# EAGLE board SterownikCNC4 (EAGLE 7.5.0)
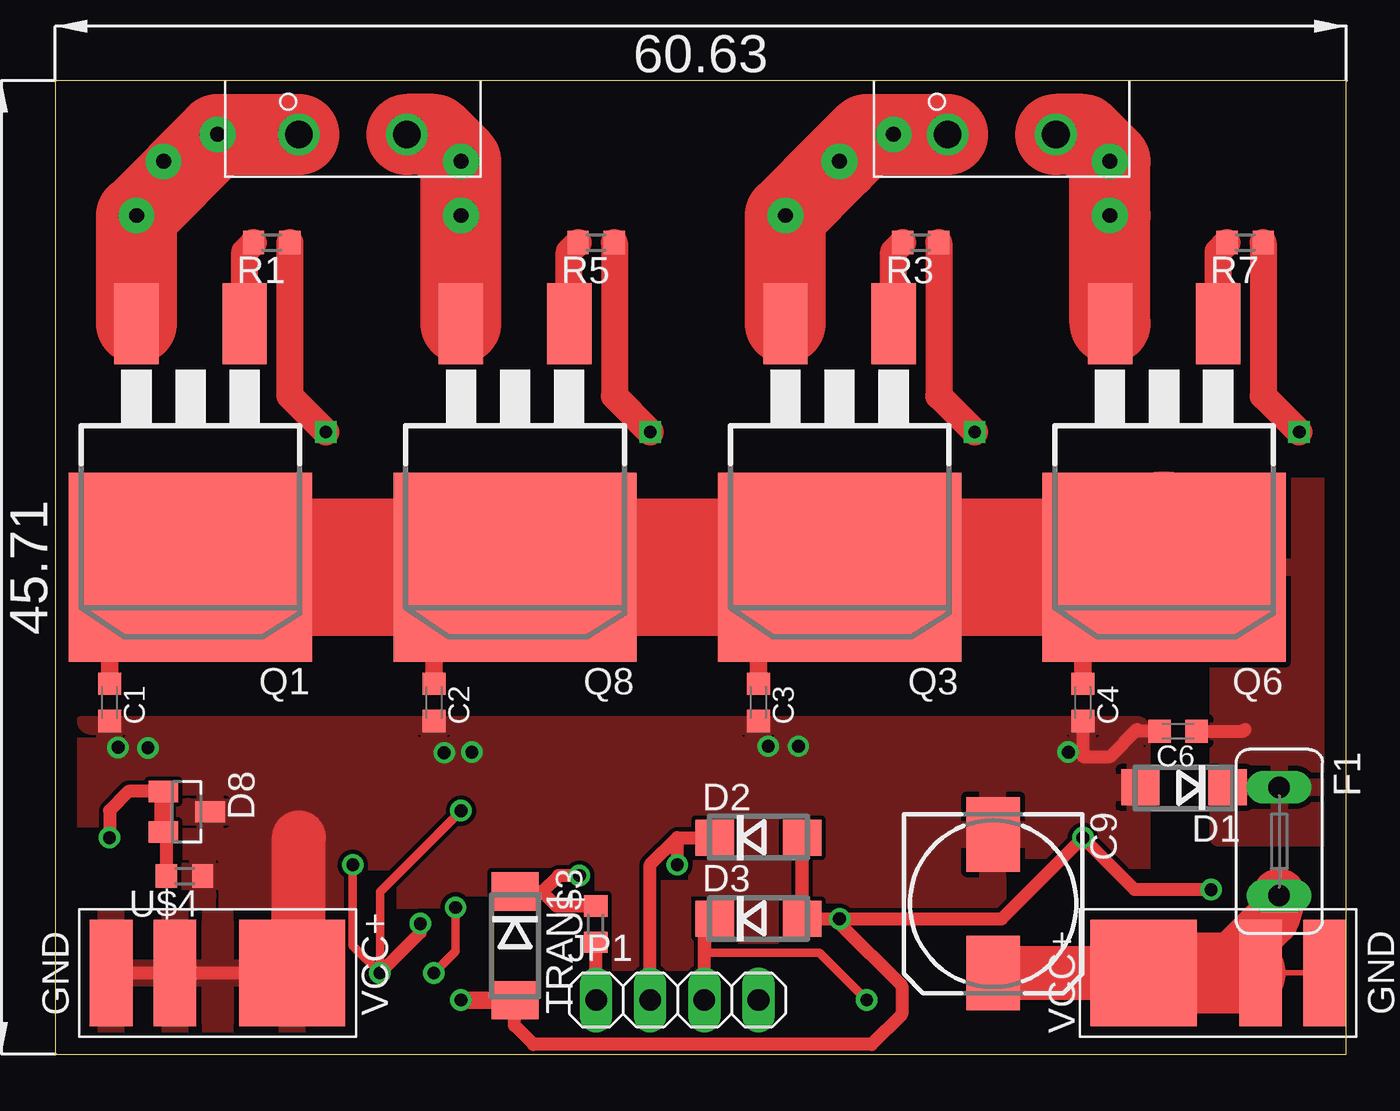
[diagram p0: board, top side]
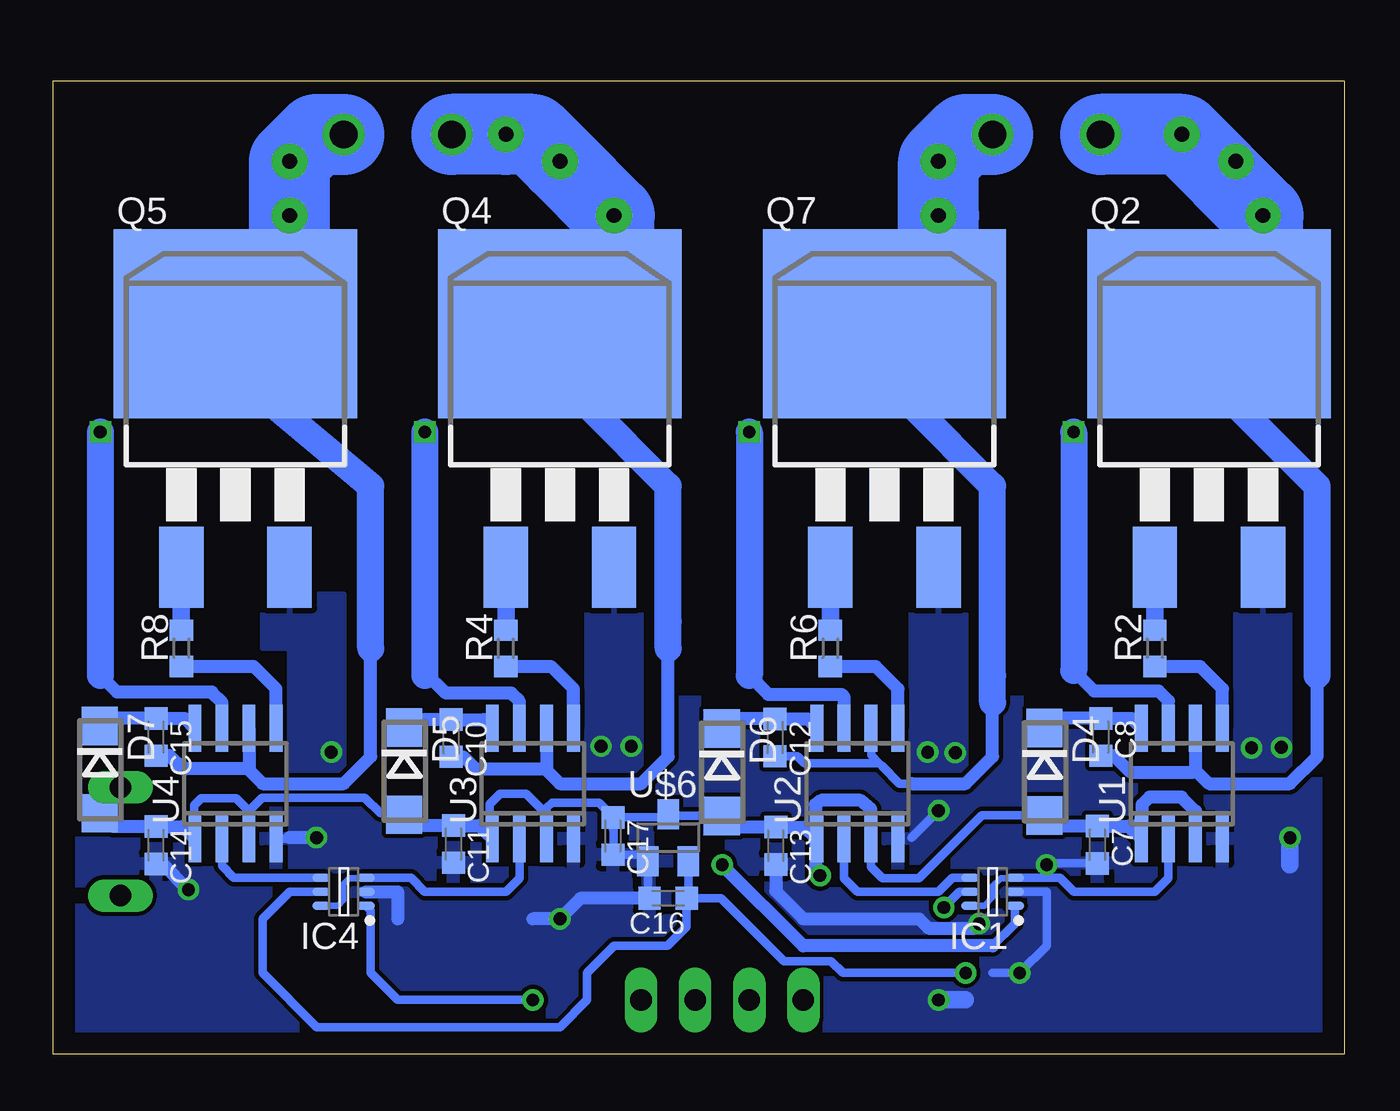
[diagram p1: board, bottom side, seen from below]

Size 60.63 x 45.71 mm. Coordinates in mm from the lower left corner, seen from the top.
Outline: 0,0 60.63,0 60.63,45.71 0,45.71 0,0
Copper layers (1*16): Top 0.035mm / dielectric 1.5mm / Bottom 0.035mm
Design rules "default": minimum track width 10mil, minimum drill 24mil, track to track 8mil, track to pad 8mil, pad to pad 8mil, via to via 8mil, smd to smd 8mil, copper to edge 40mil, drill to drill 8mil, minimum pad ring 10mil, minimum via ring 8mil, stop-mask expansion 4mil, vias tented up to drill 0mil, thermal gap 10mil

## Footprints (pad centres in the part's own frame; a part is rotated, then mirrored left to right if it is on the bottom)
C0603K = smd 1.05 x 1.08: 1 -0.875,0; 2 0.875,0
153CLV-0810 = smd 3.5 x 2.5: + 3.25,0; - -3.25,0
DO214AC = smd 1.8 x 1.7: A 2.05,0; C -2.05,0
SOT23 = smd 1 x 1.4: 1 -0.95,-1.1; 2 0.95,-1.1; 3 0,1.1
TE5 = drill 1.016 long: 1 -2.54,0; 2 2.54,0
SOT65P210X110-6AN_SC88_SC70-6 = smd 0.85 x 0.4: 1 -1.05,0.65; 2 -1.05,0; 3 -1.05,-0.65; 4 1.05,-0.65; 5 1.05,0; 6 1.05,0.65
1X04 = drill 1.016 long: 1 -3.81,0; 2 -1.27,0; 3 1.27,0; 4 3.81,0
D2PACK = smd 2.083 x 3.81: 1 -2.54,-8.89; 3 2.54,-8.89 | smd 11.43 x 8.89: 2 0,2.54
R0603 = smd 1 x 1.1: 1 -0.85,0; 2 0.85,0
DO214AA = smd 1.8 x 2.2: A 2.55,0; C -2.55,0
SO08 = smd 0.6 x 2.2: 1 -1.905,-2.6; 2 -0.635,-2.6; 3 0.635,-2.6; 4 1.905,-2.6; 5 1.905,2.6; 6 0.635,2.6; 7 -0.635,2.6; 8 -1.905,2.6
T-DEANS = smd 5 x 5: P$1 0,-3.5 | smd 5 x 2: P$2 0,2; P$3 0,5
0603 = smd 1 x 1.1: 1 -0.85,0; 2 0.85,0
PTB-5.08MM-02 = drill 1.3: 1 -2.54,0; 2 2.54,0

## Placement (x,y rotation side)
C1  100nF/50v  [C0603K]  2.54,16.51 270 top
C2  100nF/50v  [C0603K]  17.78,16.51 270 top
C3  100nF/50v  [C0603K]  33.02,16.51 270 top
C4  100nF/50v  [C0603K]  48.26,16.51 270 top
C6  10uF/50v  [C0603K]  52.73,15.16 180 top
C7  100nF/50v  [C0603K]  11.58,9.83 270 bottom
C8  10uF/50v  [C0603K]  11.43,14.88 270 bottom
C9  100uF  [153CLV-0810]  44.04,7.06 270 top
C10  10uF/50v  [C0603K]  41.94,14.83 270 bottom
C11  100nF/50v  [C0603K]  41.83,9.86 270 bottom
C12  10uF/50v  [C0603K]  26.72,14.86 270 bottom
C13  100nF/50v  [C0603K]  26.7,9.78 270 bottom
C14  100nF/50v  [C0603K]  55.8,9.8 270 bottom
C15  10uF/50v  [C0603K]  55.8,14.88 270 bottom
C16  100nF  [C0603K]  31.75,7.32 180 bottom
C17  100nF  [C0603K]  34.34,10.24 270 bottom
D1  E7-DO214AC  [DO214AC]  53.01,12.52 180 top
D2  E7-DO214AC  [DO214AC]  33.02,10.16 0 top
D3  E7-DO214AC  [DO214AC]  33.02,6.35 0 top
D4  E7-DO214AC  [DO214AC]  14.07,13.26 270 bottom
D5  E7-DO214AC  [DO214AC]  44.15,13.28 270 bottom
D6  E7-DO214AC  [DO214AC]  29.24,13.23 270 bottom
D7  E7-DO214AC  [DO214AC]  58.45,13.36 270 bottom
D8  BAT54S  [SOT23]  6.17,11.38 270 top
F1  [TE5]  57.48,9.98 270 top
IC1  NC7WP14P6X  [SOT65P210X110-6AN_SC88_SC70-6]  16.51,7.62 180 bottom
IC4  NC7WP14P6X  [SOT65P210X110-6AN_SC88_SC70-6]  46.99,7.62 180 bottom
JP1  [1X04]  29.21,2.54 0 top
Q1  IRF3704S  [D2PACK]  6.35,25.4 180 top
Q2  IRF3704S  [D2PACK]  6.35,31.75 0 bottom
Q3  IRF3704S  [D2PACK]  36.83,25.4 180 top
Q4  IRF3704S  [D2PACK]  36.83,31.75 0 bottom
Q5  IRF3704S  [D2PACK]  52.07,31.75 0 bottom
Q6  IRF3704S  [D2PACK]  52.07,25.4 180 top
Q7  IRF3704S  [D2PACK]  21.59,31.75 0 bottom
Q8  IRF3704S  [D2PACK]  21.59,25.4 180 top
R1  10  [R0603]  10.16,38.1 180 top
R2  10  [R0603]  8.89,19.05 90 bottom
R3  10  [R0603]  40.64,38.1 180 top
R4  10  [R0603]  39.37,19.05 90 bottom
R5  10  [R0603]  25.4,38.1 180 top
R6  10  [R0603]  24.13,19.05 90 bottom
R7  10  [R0603]  55.88,38.1 180 top
R8  10  [R0603]  54.61,19.05 90 bottom
TRAN1  SMBJ12A-E3/52  [DO214AA]  21.59,5.08 270 top
U1  IR2104  [SO08]  7.62,12.7 0 bottom
U2  IR2104  [SO08]  22.86,12.7 0 bottom
U3  IR2104  [SO08]  38.1,12.7 0 bottom
U4  IR2104  [SO08]  52.07,12.7 0 bottom
U$2  T-DEANS  [T-DEANS]  54.61,3.81 270 top
U$3  FUSE0603  [0603]  25.37,6.1 90 top
U$4  FERYT_0603  [R0603]  6.07,8.36 180 top
U$5  T-DEANS  [T-DEANS]  7.62,3.81 90 top
U$6  TS9011SCX  [SOT23]  31.75,10.16 0 bottom
U$7  PTB-02_5.08MM  [PTB-5.08MM-02]  13.97,43.18 0 top
U$9  PTB-02_5.08MM  [PTB-5.08MM-02]  44.45,43.18 0 top

## Library data of the parts
C1-C4 C6-C17 R1-R8 U$4 = rcl
D1-D8 TRAN1 = diode
F1 = fuse; OC_FARNELL: unknown; OC_NEWARK: unknown
IC1 IC4 = bufory,invertery
JP1 = pinhead
Q1-Q8 = transistor-power
U1-U4 U$7 U$9 = robione
U$2 U$5 = Conector_T-deans
U$3 = fuse
U$6 = v-reg

## Nets
+3V3: C16.1 IC1.5 IC4.5 U$6.2
+24V: C1.1 C2.1 C3.1 C4.1 C6.1 D1.C F1.1 Q1.2 Q3.2 Q6.2 Q8.2
F2: JP1.1 U$3.1
GND: C7.2 C11.2 C13.2 C14.2 C16.2 C17.2 D2.A D3.A D8.1 D8.2 IC1.2 IC4.2 TRAN1.A U1.4 U2.4 U3.4 U4.4 U$4.2 U$6.1
GNDA: C1.2 C2.2 C3.2 C4.2 C6.2 C9.- D1.A D8.3 Q2.3 Q4.3 Q5.3 Q7.3 U$4.1 U$5.P$1 U$5.P$2 U$5.P$3
M_OUT: C8.2 Q1.3 Q2.2 U1.6 U$7.1
M_OUT1: C12.2 Q7.2 Q8.3 U2.6 U$7.2
M_OUT2: C10.2 Q3.3 Q4.2 U3.6 U$9.1
M_OUT3: C15.2 Q5.2 Q6.3 U4.6 U$9.2
N$1: Q1.1 R1.2
N$2: Q2.1 R2.2
N$3: R1.1 U1.7
N$4: R2.1 U1.5
N$5: IC1.4 U2.2
N$6: IC4.4 U4.2
N$7: R5.1 U2.7
N$8: R6.1 U2.5
N$10: Q7.1 R6.2
N$11: Q8.1 R5.2
N$12: C10.1 D5.C U3.8
N$13: C9.+ F1.2 U$2.P$1 U$2.P$2 U$2.P$3
N$14: R3.1 U3.7
N$15: R4.1 U3.5
N$16: Q4.1 R4.2
N$17: Q3.1 R3.2
N$18: C15.1 D7.C U4.8
N$20: R7.1 U4.7
N$21: R8.1 U4.5
N$22: Q5.1 R8.2
N$23: Q6.1 R7.2
N$49: C8.1 D4.C U1.8
N$51: C12.1 D6.C U2.8
PWM1: D2.C IC1.1 JP1.2
PWM1_NEG: IC1.3 IC1.6 U1.2
PWM2: D3.C IC4.1 JP1.3
PWM2_NEG: IC4.3 IC4.6 U3.2
PWM3: JP1.4
VCC: C7.1 C11.1 C13.1 C14.1 C17.1 D4.A D5.A D6.A D7.A TRAN1.C U1.1 U1.3 U2.1 U2.3 U3.1 U3.3 U4.1 U4.3 U$3.2 U$6.3

## Tracks (layer width: path | path; a pad name or v marks a point on that pad's centre or on a via)
+3V3  (via drill 0.6 pad 0.61)
  Top 0.406: v18.8,6.88 18.8,4.83 v17.78,3.81
  Bottom 0.406: IC1.5 18.06,7.62 v18.8,6.88 | IC4.5 49.53,7.62 50.8,6.35 50.8,3.81 48.26,1.27 36.83,1.27 35.56,2.54 35.56,3.81 34.29,5.08 31.77,5.08 30.88,5.98 C16.1 | U$6.2 30.8,7.39 C16.1 | v17.78,3.81 23.55,3.81 24.11,4.37 26.31,4.37 29.26,7.32 C16.1
+24V
  Top 0.61: C6.1 55.8,15.16 55.88,15.24
  Top 0.813: C1.1 2.54,21.59 3.81,22.86 Q1.2 | C2.1 17.78,22.86 | C3.1 33.02,20.32 35.56,22.86 | C4.1 48.26,20.32 50.8,22.86
  Top 6.452: Q1.2 17.78,22.86 Q8.2 35.56,22.86 Q3.2 50.8,22.86 Q6.2 52.07,24.13
  pour Top: 54.61,26.67 60.96,26.67 60.96,10.16 54.61,10.16
F2
  Top 0.61: JP1.1 25.4,5.22 U$3.1
GND  (via drill 0.6 pad 0.61)
  Top 0.406: v13.97,8.89 13.97,5.08 v15.24,3.81 15.24,7.62 v19.05,11.43
  Top 0.61: D3.A D2.A 35.07,6.84 35.56,6.35 v36.83,6.35 | D8.1 3.44,12.33 2.54,11.43 v2.54,10.16 | U$4.2 5.22,10.28 D8.2 | v54.28,7.72 50.7,7.72 v48.26,10.16 44.45,6.35 v36.83,6.35 | v17.14,6.12 17.14,5.71 v15.24,3.81 | v36.83,6.35 36.83,6.12 39.75,3.2 39.75,1.88 38.33,0.46 22.45,0.46 21.57,1.35 21.57,2.5 TRAN1.A
  Top 0.813: D8.2 D8.1 | TRAN1.A v19.06,2.53 v19.05,2.54
  Bottom 0.406: U4.4 48.32,10.1 v48.26,10.16 | C16.2 32.7,7.39 U$6.1 33,9.36 C17.2 | C7.2 13.9,8.96 v13.97,8.89 | 16.51,3.81 v15.24,3.81 13.97,5.08 13.97,7.62 IC1.2 | v19.05,11.43 20.32,10.16
  Bottom 0.61: IC4.2 44.45,7.62 44.45,6.35 | 38.1,6.35 v36.83,6.35 35.87,7.32 C16.2 | C14.2 55.49,8.93 v54.28,7.72 | v48.26,10.16 49.53,10.16 | C13.2 26.7,7.64 25.4,6.35 19.96,6.35 19.53,5.92 17.35,5.92 v17.14,6.12
  Bottom 0.813: v2.54,10.16 2.54,8.89 | v19.05,2.54 17.78,2.54
  pour Bottom: 1.27,16.51 60.96,16.51 60.96,0 1.27,0
GNDA  (via drill 0.6 pad 0.61)
  Top 0.61: U$5.P$3 10.16,3.81 11.43,5.08 | C6.2 50.88,15.16 50.8,15.24 49.53,13.97 48.26,13.97 C4.2
  Top 2.54: 11.43,5.08 11.43,10.16
  other vias: 4.34,14.38 2.95,14.4 18.26,14.15 19.56,14.17 33.48,14.45 34.9,14.45 47.57,14.17
  pour Top: 1.27,15.24 50.8,15.24 50.8,1.27 1.27,1.27
  pour Bottom: 2.54,21.59 2.54,12.7 5.08,12.7 5.08,21.59
  pour Bottom: 17.78,21.59 17.78,12.7 20.32,12.7 20.32,21.59
  pour Bottom: 33.02,21.59 33.02,12.7 35.56,12.7 35.56,21.59
  pour Bottom: 46.99,12.7 49.53,12.7 49.53,19.05 50.8,19.05 50.8,21.59 46.99,21.59
M_OUT  (via drill 0.7 pad 1.68)
  Top 3.81: Q1.3 v3.81,39.37 v7.62,43.18 U$7.1
  Bottom 0.61: 1.27,19.05 1.27,13.97 2.54,12.7 6.35,12.7 6.99,13.34 | U1.6 6.99,13.34 | C8.2 10.81,14.01 10.03,13.23 7.09,13.23 6.99,13.34
  Bottom 1.27: 1.27,17.78 1.27,19.05 1.27,26.67 6.35,31.75 6.35,33.02 7.62,34.29 Q2.2
  Bottom 3.81: Q2.2 3.81,36.83 v3.81,39.37 v7.62,43.18 U$7.1
M_OUT1  (via drill 0.7 pad 1.68)
  Top 3.81: Q8.3 v19.05,39.37 v19.05,41.91 17.78,43.18 U$7.2
  Bottom 0.406: 20.32,12.7 20.88,12.7 21.72,13.54 21.84,13.66 | 21.84,13.66 22.2,14.02 22.2,15.28 U2.6 | C12.2 25.67,13.98 25.35,13.66 21.84,13.66
  Bottom 0.61: 20.32,12.7 17.78,12.7 16.51,13.97 16.51,17.78
  Bottom 1.27: 16.51,16.51 16.51,17.78 16.51,26.67 20.32,30.48 20.32,33.02 Q7.2
  Bottom 3.81: Q7.2 19.05,36.83 v19.05,39.37 v19.05,41.91 17.78,43.18 U$7.2
M_OUT2  (via drill 0.7 pad 1.68)
  Top 3.81: Q3.3 v34.29,39.37 v36.83,41.91 38.1,43.18 v39.37,43.18 U$9.1
  Bottom 0.61: U3.6 37.47,13.34 | 37.47,13.34 36.83,12.7 33.02,12.7 31.75,13.97 31.75,20.32 | C10.2 41.37,13.96 40.79,13.39 37.52,13.39 37.47,13.34
  Bottom 1.27: 31.75,19.05 31.75,20.32 31.75,26.67 35.56,30.48 35.56,33.02 Q4.2
  Bottom 3.81: Q4.2 34.29,36.83 v34.29,39.37 v36.83,41.91 38.1,43.18 v39.37,43.18 U$9.1
M_OUT3  (via drill 0.7 pad 1.68)
  Top 3.81: Q6.3 v49.53,39.37 v49.53,41.91 48.26,43.18 U$9.2
  Bottom 0.61: U4.6 51.44,13.34 | 51.44,13.34 50.8,12.7 46.99,12.7 45.72,13.97 45.72,19.05 | C15.2 55.18,14.01 54.59,13.41 51.51,13.41 51.44,13.34
  Bottom 1.27: 45.72,19.05 45.72,26.67 53.34,33.02 Q5.2
  Bottom 3.81: Q5.2 49.53,36.83 v49.53,39.37 v49.53,41.91 48.26,43.18 U$9.2
N$1
  Top 1.27: Q1.1 8.89,37.68 R1.2
N$2
  Bottom 0.813: R2.2 Q2.1
N$3  (via drill 0.6)
  Top 1.27: R1.1 11.01,30.9 v12.7,29.21
  Bottom 0.61: U1.7 8.26,16.59 8.71,17.04 11.73,17.04 12.7,18.01
  Bottom 1.27: v12.7,29.21 12.7,18.01
N$4
  Bottom 0.61: U1.5 5.71,17.14 6.77,18.2 R2.1
N$5
  Bottom 0.406: U2.2 23.5,8.26 22.86,7.62 19.05,7.62 18.4,8.27 IC1.4
N$6
  Bottom 0.406: U4.2 52.7,8.84 52.15,8.28 IC4.4
N$7  (via drill 0.6)
  Top 1.27: R5.1 26.25,30.9 v27.94,29.21
  Bottom 0.61: 27.94,17.78 27.05,16.89 23.6,16.89 23.5,16.79 U2.7
  Bottom 1.27: v27.94,29.21 27.94,17.78
N$8
  Bottom 0.61: U2.5 20.95,17.14 22.01,18.2 R6.1
N$9  (via drill 0.7 pad 1.68)
  other vias: 5.08,41.91
N$10
  Bottom 0.813: R6.2 Q7.1
N$11
  Top 1.27: Q8.1 24.13,37.68 R5.2
N$12
  Bottom 0.61: D5.C 43.77,15.71 C10.1 40.41,15.71 U3.8
N$13
  Top 0.254: U$2.P$3 U$2.P$2 55.88,3.81
  Top 2.54: C9.+ U$2.P$1 | F1.2 57.15,6.35 54.61,3.81
  Top 3.81: U$2.P$1 54.61,3.81 55.88,3.81
N$14  (via drill 0.6)
  Top 1.27: R3.1 41.49,30.9 v43.18,29.21
  Bottom 0.61: U3.7 38.73,16.56 39.12,16.94 42.19,16.94 43.18,17.93
  Bottom 1.27: v43.18,29.21 43.18,17.93 43.18,17.78
N$15
  Bottom 0.61: U3.5 36.2,17.14 37.25,18.2 R4.1
N$16
  Bottom 0.813: R4.2 Q4.1
N$17
  Top 1.27: Q3.1 39.37,37.68 R3.2
N$18
  Bottom 0.61: U4.8 54.43,15.76 C15.1 58.1,15.76 D7.C
N$20  (via drill 0.6)
  Top 1.27: R7.1 56.73,30.9 v58.42,29.21
  Bottom 0.61: U4.7 52.7,16.51 53.19,16.99 57.63,16.99 58.42,17.78
  Bottom 1.27: v58.42,29.21 58.42,17.78
N$21
  Bottom 0.61: U4.5 50.16,17.14 51.22,18.2 R8.1
N$22
  Bottom 0.813: R8.2 Q5.1
N$23
  Top 1.27: Q6.1 54.61,37.68 R7.2
N$49
  Bottom 0.61: U1.8 9.98,15.76 C8.1 13.62,15.76 D4.C
N$51
  Bottom 0.61: D6.C 28.79,15.73 C12.1 25.2,15.73 U2.8
PWM1  (via drill 0.6 pad 0.61)
  Top 0.61: JP1.2 27.94,8.89 29.21,10.16 | 29.21,10.16 D2.C | v29.21,8.89 29.21,10.16
  Bottom 0.406: IC1.1 15.46,6.13 16.51,5.08
  Bottom 0.61: 16.51,5.08 25.4,5.08 v29.21,8.89
PWM1_NEG
  Bottom 0.305: IC1.6 16.91,6.97 16.51,7.37 16.51,7.87 16.13,8.26 15.47,8.26 IC1.3
  Bottom 0.406: U1.2 8.26,8.26 8.89,7.62 12.7,7.62 13.35,8.27 IC1.3
PWM2  (via drill 0.6 pad 0.61)
  Top 0.406: D3.C 30.97,5.98 30.61,5.61 30.61,4.83 30.53,4.75 35.89,4.75 v38.1,2.54
  Top 0.61: JP1.3 30.48,5.86 D3.C
  Bottom 0.406: v38.1,2.54 44.45,2.54 45.72,3.81 45.72,6.75 IC4.1
PWM2_NEG
  Bottom 0.305: IC4.6 47.26,6.97 47.02,7.21 47.02,7.98 46.74,8.26 45.95,8.26 IC4.3
  Bottom 0.406: IC4.3 43.83,8.27 43.18,7.62 39.37,7.62 38.73,8.26 U3.2
VCC  (via drill 0.6 pad 0.61)
  Top 0.61: U$3.2 23.53,6.95 22.86,7.62 | 22.86,7.62 TRAN1.C | v24.61,8.38 23.62,8.38 22.86,7.62
  Bottom 0.406: D6.A 31.34,11.18 31.75,10.77 U$6.3 31.9,11.11 C17.1 34.31,9.87 34.31,11.12 35,11.81 37.21,11.81 37.47,11.56 U3.3 37.47,11.25 38.43,12.22 39.65,12.22 40.13,11.73 40.13,10.72 40.38,10.47 | D4.A 17.01,11.21 19.96,8.26 21.69,8.26 22.23,8.79 U2.3 | U4.3 51.44,11.4 | 51.44,11.4 52.05,12.01 53.67,12.01 54,11.68 54,10.12 U4.1 | 51.44,11.4 51.44,11.43 50.83,12.04 46,12.04 45.26,11.3 44.21,11.3 D5.A
  Bottom 0.61: D5.A 43.64,10.73 C11.1 40.63,10.73 40.38,10.47 U3.1 | D4.A 13.57,10.71 C7.1 10.13,10.71 9.95,10.52 | 9.95,10.52 U1.1 | 25.32,10.65 C13.1 28.71,10.65 D6.A | 25.32,10.65 U2.1 24.84,10.18 | U4.1 54.55,10.68 C14.1 57.81,10.68 D7.A | U1.3 6.99,11.4 7.64,12.06 9.14,12.06 9.5,11.71 9.5,10.97 9.95,10.52 | U2.3 22.23,11.51 22.71,11.91 24.56,11.91 24.84,11.71 24.84,10.16 | 24.84,10.16 24.84,8.61 v24.61,8.38 | 25.32,10.65 25.32,10.64 24.84,10.16

## Text on the board
OrgLBR: Czy tych złącz nie da się ścisnąć? | Sprawdzić: / 1. Kondensator polimerowy / 2. Bezpiecznik +24V | Logika i zasilanie 12v do wyplatania | Napisy do poprawienia | Pamietac o ERC 8mils